# Altium PCB joint_board_boosterpack.PcbDoc
Units mil, origin at the board's own origin, x right, y up, seen from the top; angles counter-clockwise.
Board outline 6000 x 4000 mil, 2 copper layers (Top Layer, Bottom Layer); 43 components, 39 nets, 187 pads, 13 vias.
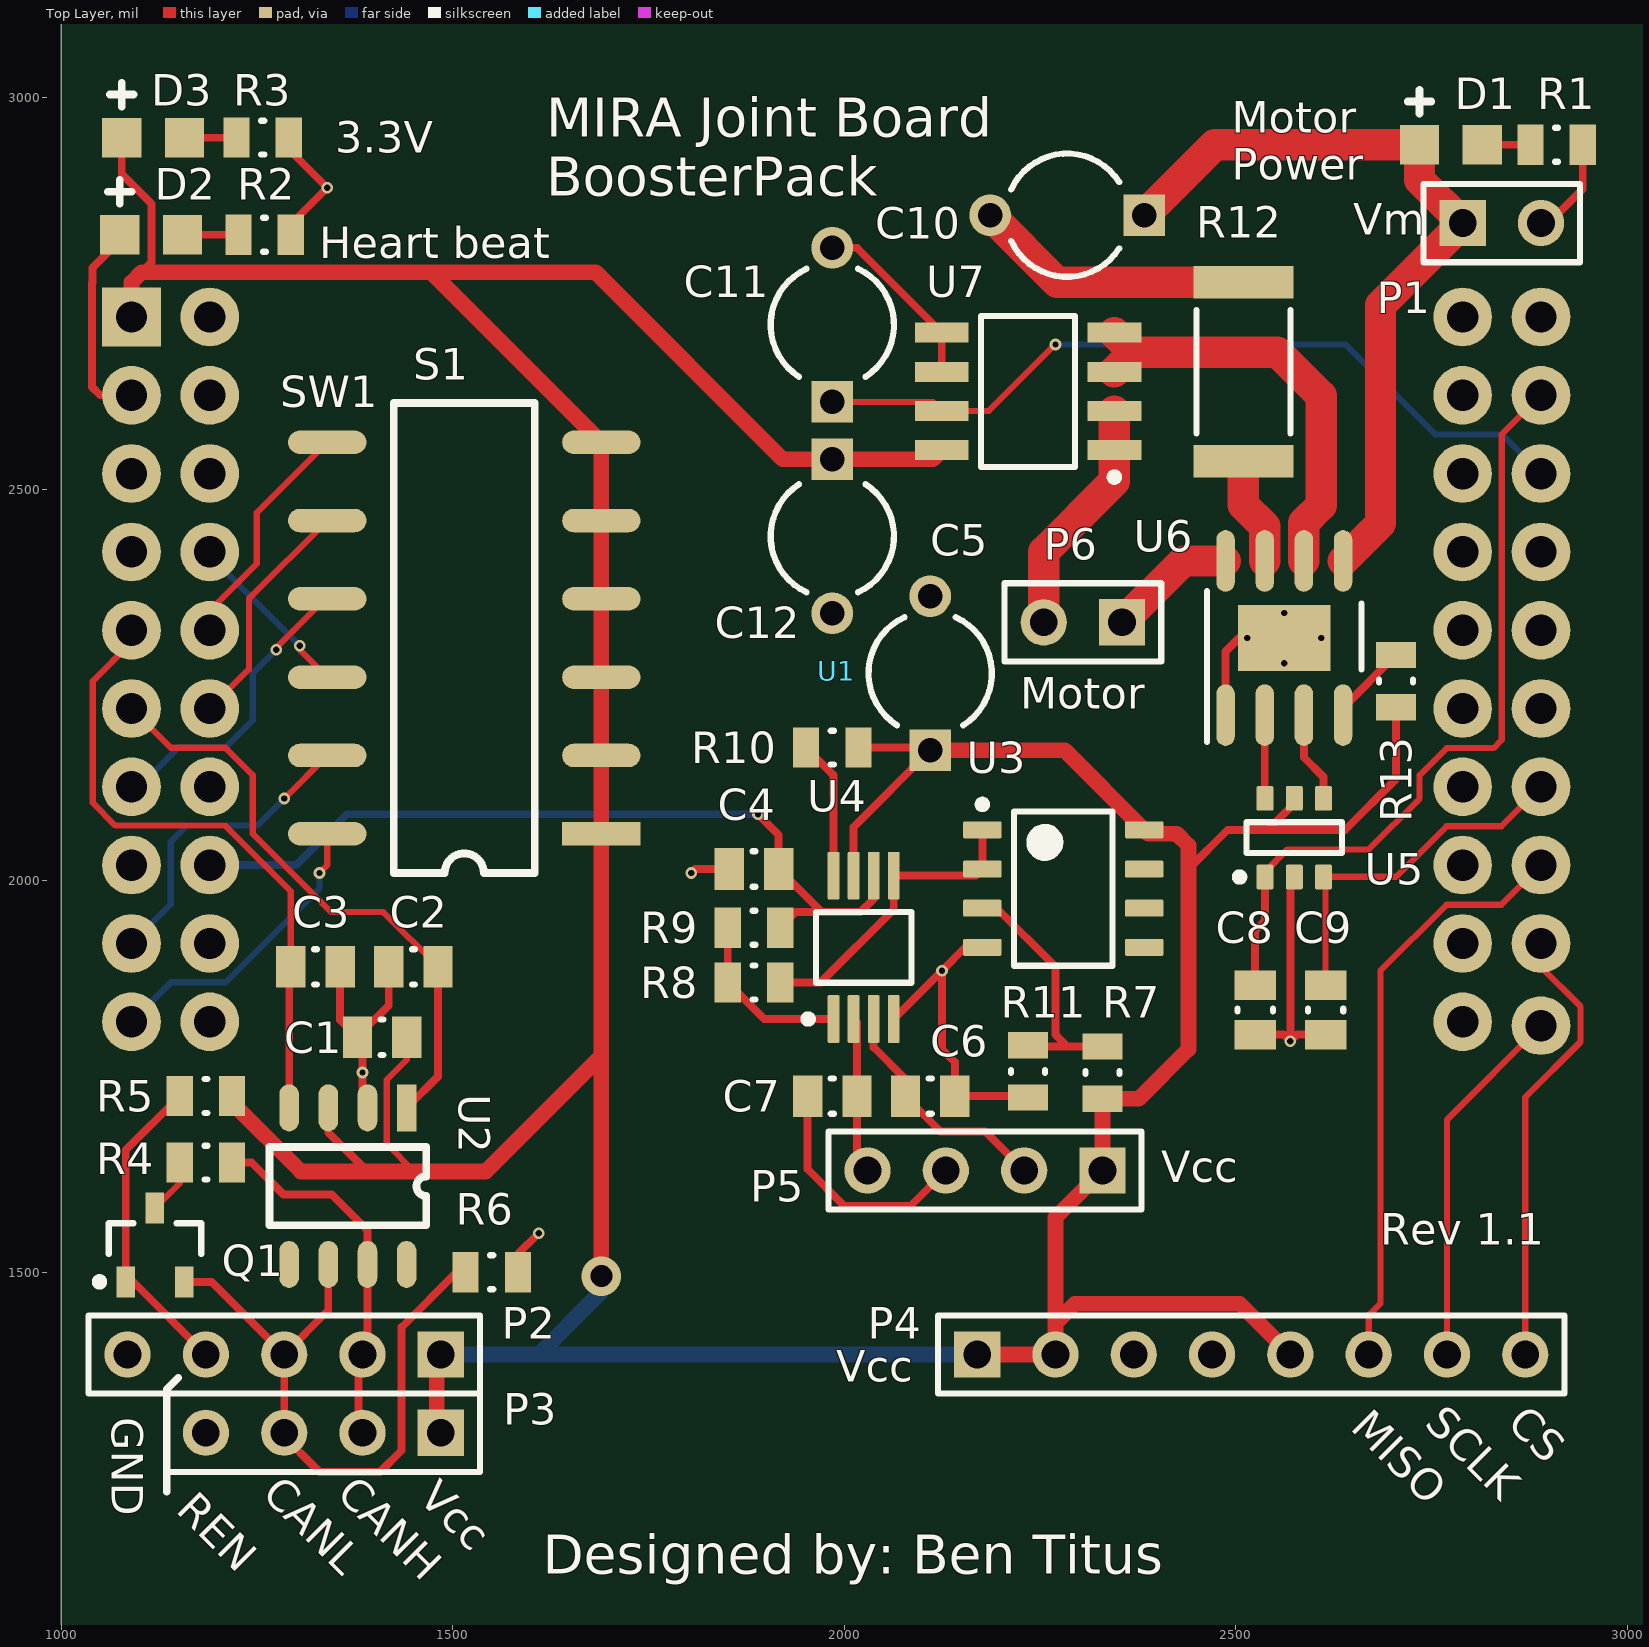
[diagram p0: Top Layer view]
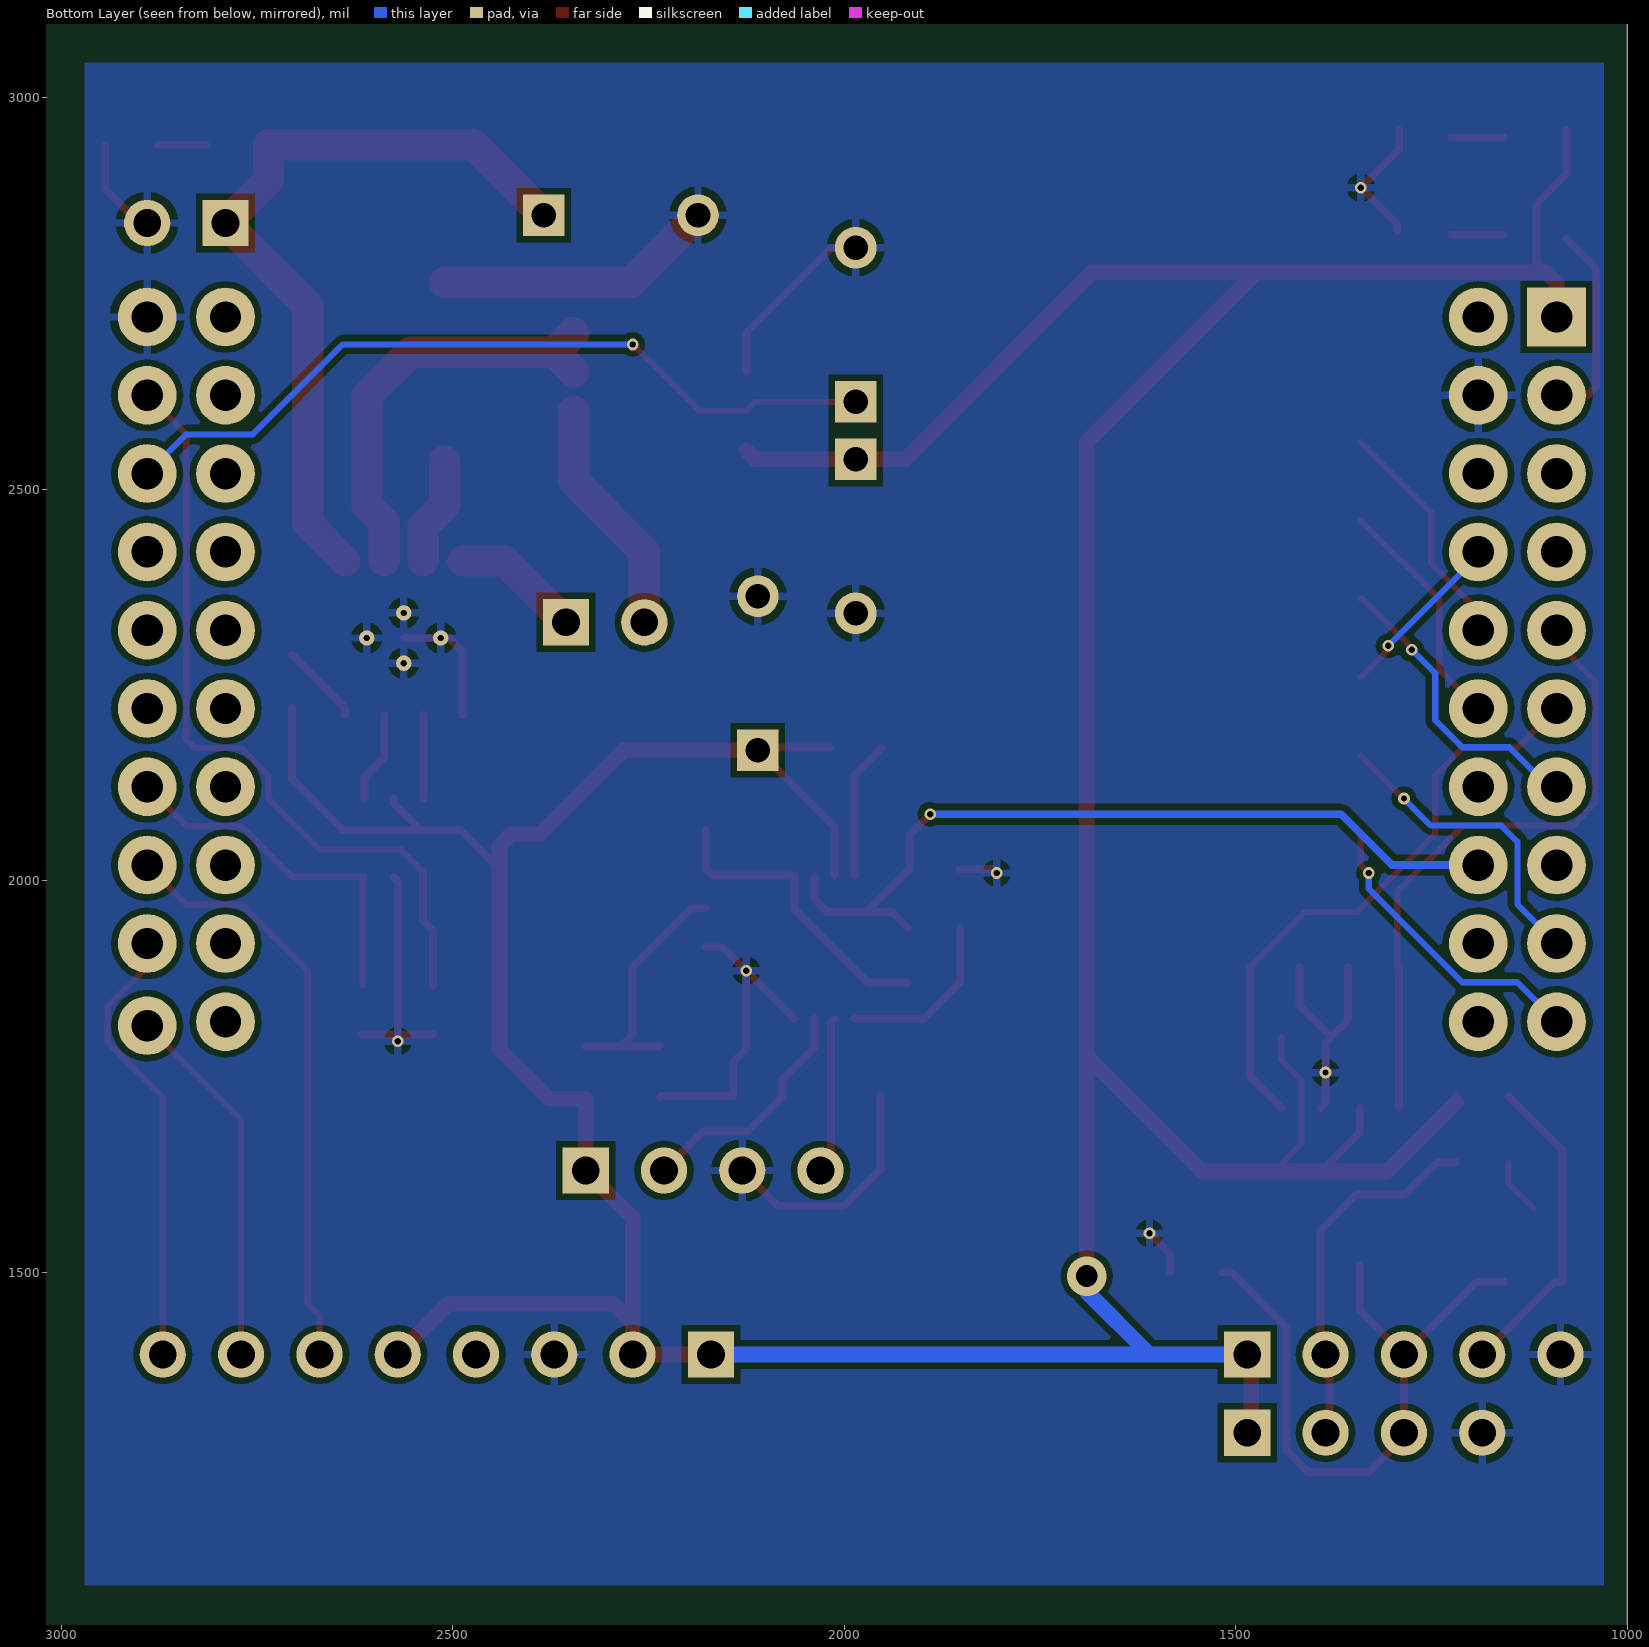
[diagram p1: Bottom Layer view, seen from below]

## Layer stack, top to bottom
Top Solder: solder mask 0.4, Solder Resist, Dk 3.5
Top Layer: signal copper 1.4
Dielectric 1: dielectric 12.6, FR-4, Dk 4.8
Bottom Layer: signal copper 1.4
Bottom Solder: solder mask 0.4, Solder Resist, Dk 3.5

## Board outline
1000,1000 7000,1000 7000,5000 1000,5000

## Design rules (kind name [scope] priority, off if disabled: settings)
Clearance [All] p1: gap=8 ignorepadtopadclearanceinfootprint=FALSE
ComponentClearance [All] p1 off: gap=10 collisioncheckmode=3 verticalgap=10 showdistances=FALSE
PolygonConnect [All] p1: connectstyle=Relief reliefconductorwidth=10 reliefentries=4 polygonreliefangle="90 Angle" airgapwidth=10
RoutingVias [All] p1: holewidth=28 width=50 viastyle="Through Hole" minholewidth=8 minwidth=15 maxholewidth=28 maxwidth=50
SolderMaskExpansion [All] p1: expansion=4
Width [All] p1: maxlimit=100 minlimit=8 preferedwidth=8
29 further rules are at their usual default settings.

## Classes and differential pairs
component class joint_board_boosterpack: D1 D2 D3 P1 P2 P6 R1 R2 R3 U1
component class joint_board_boosterpack_motor_drivers: C8 C9 C10 C11 C12 P6 R12 R13 U5 U6 U7
component class joint_board_boosterpack_load_cell: C4 C5 C6 C7 P6 R7 R8 R9 R10 R11 U3 U4
component class joint_board_boosterpack_hall_effect_encoder: P6
component class joint_board_boosterpack_can: C1 C2 C3 Q1 R4 R5 R6 S1 U2

## Components (designator, comment, footprint, x,y, rotation, side; value= is the part's Value field where it differs from the comment)
C1 "0.1uF" CAPC0805(2012)145_L 1410,1800 r0 top
C2 "47pF" CAPC0805(2012)145_L 1450,1890 r0 top
C3 "47pF" CAPC0805(2012)145_L 1325,1890 r180 top
C4 "10nF" CAPC0805(2012)145_L 1885,2015 r0 top
C5 "1uF" CAPR5-4X5 2110,2265 r90 top
C6 "10nF" CAPC0805(2012)145_L 2110,1725 r180 top
C7 "10nF" CAPC0805(2012)145_L 1985,1725 r0 top
C8 "10nF" CAPC0805(2012)145_L 2525,1835 r90 top
C9 "10nF" CAPC0805(2012)145_L 2615,1835 r90 top
C10 "100uF" CAPR5-4X5 2285,2850 r180 top
C11 "0.1uF" CAPR5-4X5 1985,2710 r90 top
C12 "0.1uF" CAPR5-4X5 1985,2440 r270 top
D1 "VM_LED" "0805 DIODE" 2775,2940 r0 top
D2 "HB_LED_LED" "0805 DIODE" 1115,2825 r0 top
D3 "VCC_LED" "0805 DIODE" 1117.5,2949 r0 top
P1 "Header 2" HDR1X2 2790,2840 r0 top
P2 "Header 5" HDR1X5 1485,1395 r180 top
P3 "Header 4" HDR1X4 1485,1295 r180 top
P4 "Header 8" HDR1X8 2170,1395 r0 top
P5 "Load Cell" HDR1X4 2330,1630 r180 top
P6 "Header 2" HDR1X2 2355,2330 r180 top
Q1 "BS170" SOT23-3 1120,1535 r90 top
R1 "4k" RESC0805(2012)_L 2910,2940 r180 top
R2 "1k" RESC0805(2012)_L 1260,2825 r180 top
R3 "1k" RESC0805(2012)_L 1257.5,2949 r180 top
R4 "115" RESC0805(2012)_L 1185,1640 r0 top
R5 "1k" RESC0805(2012)_L 1185,1725 r0 top
R6 "100k" RESC0805(2012)_L 1550,1500 r180 top
R7 "5.0k" RESC0805(2012)_L 2330,1755 r270 top
R8 "1k" RESC0805(2012)_L 1885,1870 r180 top
R9 "200k" RESC0805(2012)_L 1885,1940 r0 top
R10 "10k" RESC0805(2012)_L 1985,2170 r180 top
R11 "3.9k" RESC0805(2012)_L 2235,1756.54 r90 top
R12 "0.1 Shunt Resistor" RESC2512(6432)_L 2510,2650 r270 top
R13 "10k" RESC0805(2012)_L 2705,2255 r90 top
S1 "DIP_Switch_6" SOP12 1690,2060 r180 top
U1 "BoosterPack Headers" boosterpack_headers 1090,2720 r0 top
U2 "TCAN332" SOP8 1441.37,1710 r270 top
U3 "LM358DR" D0008A_L 2280,1990 r0 top
U4 "INA332AIDGKR" DGK0008A_M 2025,1915 r90 top
U5 "SN74LVC1G18DBVR" DBV0006A_L 2575,2055 r90 top
U6 "DRV8872DDAR" DDA0008H_N 2562.24,2310 r90 top value=Value
U7 "ACS722LLCTR-05AB-T" ALEG-LC-8_V 2235,2625 r90 top

## Footprints (in the part's own frame and the unit in brackets; to place one, negate y for a bottom-side part, rotate by r counter-clockwise, add the part's x,y. Pads: shape width x height; smd on the part's side, far side on the other; paste and mask are expansions set on the pad)
"0805 DIODE" [mil]
  rect 50x50 smd: 1(-40,0) 2(40,0)
  silkscreen extent -55,40 -25,70
ALEG-LC-8_V [mm] "SOIC, 8-Leads, Body 4.9x3.9mm, Pitch 1.27mm"
  rect 0.65x1.75 smd: 1(-1.905,-2.8) 2(-0.635,-2.8) 3(0.635,-2.8) 4(1.905,-2.8) 5(1.905,2.8) 6(0.635,2.8) 7(-0.635,2.8) 8(-1.905,2.8)
  silkscreen extent -2.9,-2.93 2.45,1.53, body extent -2.45,-1.95 2.45,1.95, height 1.75
boosterpack_headers [mil]
  rect 75x75 hole 40: 1(0,0)
  round 75 hole 40: 2(0,-100) 3(0,-200) 4(0,-300) 5(0,-400) 6(0,-500) 7(0,-600) 8(0,-700) 9(0,-800) 10(0,-900) 11(1800,-905) 12(1800,-800) 13(1800,-700) 14(1800,-600) 15(1800,-500) 16(1800,-400) 17(1800,-300) 18(1800,-200) 19(1800,-100) 20(1800,0) 21(100,0) 22(100,-100) 23(100,-200) 24(100,-300) 25(100,-400) 26(100,-500) 27(100,-600) 28(100,-700) 29(100,-800) 30(100,-900) 31(1700,-900) 32(1700,-800) 33(1700,-700) 34(1700,-600) 35(1700,-500) 36(1700,-400) 37(1700,-300) 38(1700,-200) 39(1700,-100) 40(1700,0)
CAPC0805(2012)145_L [mm]
  rect 0.95x1.35 smd: 1(-0.8,0) 2(0.8,0)
  silkscreen extent -0.05,-0.58 0.05,0.58, body extent -1.1,-0.72 1.1,0.72, height 1.45
CAPR5-4X5 [mm] "Capacitor; 2 Leads"
  rect 1.35x1.35 hole 0.8: 1(-2.5,0)
  round 1.35 hole 0.8: 2(2.5,0)
  silkscreen extent -1.69,-2 1.82,2
D0008A_L [mm] "SOIC, 8-Leads, Body 5x4mm, Pitch 1.27mm, IPC High Density"
  rrect18% 1.25x0.55 smd: 1(-2.625,1.905) 2(-2.625,0.635) 3(-2.625,-0.635) 4(-2.625,-1.905) 5(2.625,-1.905) 6(2.625,-0.635) 7(2.625,0.635) 8(2.625,1.905)
  silkscreen extent -2.75,-2.5 1.6,2.85, body extent -3,-2.45 3,2.45, height 1.63
DBV0006A_L [mm] "SOT23, 6-Leads, Body 3.05x1.75mm, Pitch 0.95mm, IPC High Density"
  rrect18% 0.8x0.55 smd: 1(-1.275,0.95) 2(-1.275,0) 3(-1.275,-0.95) 4(1.275,-0.95) 5(1.275,0) 6(1.275,0.95)
  silkscreen extent -1.4,-1.55 0.5,1.9, body extent -1.42,-1.46 1.42,1.46, height 1.11
DDA0008H_N [mm]
  oval 2x0.6 smd paste+0 mask+0.051: 1(-2.5,1.905) 2(-2.5,0.635) 3(-2.5,-0.635) 4(-2.5,-1.905) 5(2.5,-1.905) 6(2.5,-0.635) 7(2.5,0.635) 8(2.5,1.905)
  rect 2.13x3 smd paste+0 mask+0.051: 9(0,0)
  round 0.5 / inner round 1.524 / far side round 0.5 hole 0.203 mask+0.051: V(-0.815,0) V(0,1.2) V(0,-1.2) V(0.815,0)
  silkscreen extent -3.38,-2.5 1.53,2.51, body extent 0,0 0.25,0.25, height 0.25
DGK0008A_M [mm] "TSOP, 8-Leads, Body 3.1x3.1mm, Pitch 0.65mm, IPC Low Density"
  rrect22% 1.55x0.381 smd: 1(-2.325,0.975) 2(-2.325,0.325) 3(-2.325,-0.325) 4(-2.325,-0.975) 5(2.325,-0.975) 6(2.325,-0.325) 7(2.325,0.325) 8(2.325,0.975)
  silkscreen extent -2.45,-1.55 1.15,1.92, body extent -2.45,-1.5 2.45,1.5, height 0.94
HDR1X2 [mm] "Connector; Header; 2 Position"
  rect 1.5x1.5 hole 0.9: 1(0,0)
  round 1.5 hole 0.9: 2(2.54,0)
  silkscreen extent -1.27,-1.27 3.81,1.27
HDR1X4 [mm] "Connector; Header; 4 Position"
  rect 1.5x1.5 hole 0.9: 1(0,0)
  round 1.5 hole 0.9: 2(2.54,0) 3(5.08,0) 4(7.62,0)
  silkscreen extent -1.27,-1.27 8.89,1.27
HDR1X5 [mm] "Connector; Header; 5 Position"
  rect 1.5x1.5 hole 0.9: 1(0,0)
  round 1.5 hole 0.9: 2(2.54,0) 3(5.08,0) 4(7.62,0) 5(10.16,0)
  silkscreen extent -1.27,-1.27 11.43,1.27
HDR1X8 [mm] "Connector; Header; 8 Position"
  rect 1.5x1.5 hole 0.9: 1(0,0)
  round 1.5 hole 0.9: 2(2.54,0) 3(5.08,0) 4(7.62,0) 5(10.16,0) 6(12.7,0) 7(15.24,0) 8(17.78,0)
  silkscreen extent -1.27,-1.27 19.05,1.27
RESC0805(2012)_L [mm]
  rect 0.85x1.3 smd: 1(-0.85,0) 2(0.85,0)
  silkscreen extent -0.05,-0.55 0.05,0.55, body extent -1.1,-0.67 1.1,0.68, height 0.7
RESC2512(6432)_L [mm]
  rect 1.05x3.25 smd: 1(-2.9,0) 2(2.9,0)
  silkscreen extent -2,-1.52 2,1.53, body extent -3.25,-1.7 3.25,1.7, height 0.75
SOP8 [mil]
  rect 60x25 smd: 1(0,0)
  oval 60x25 smd: 2(0,-50) 3(0,-100) 4(0,-150) 5(200,-150) 6(200,-100) 7(200,-50) 8(200,0)
  silkscreen extent 50,-175 150,25
SOP12 [mil]
  rect 100x30 smd: 1(0,0)
  oval 100x30 smd: 2(0,-100) 3(0,-200) 4(0,-300) 5(0,-400) 6(0,-500) 7(350,-500) 8(350,-400) 9(350,-300) 10(350,-200) 11(350,-100) 12(350,0)
  silkscreen extent 85,-550 265,50
SOT23-3 [mm] "SOT23, 3-Leads, Body 2.90x2.45mm, Pitch 0.95mm, IPC Medium Density"
  rect 1x0.6 smd: 1(-1.2,0.95) 2(-1.2,-0.95) 3(1.2,0)
  silkscreen extent -1.32,-1.5 0.7,1.92, body extent -0.7,-1.5 0.7,1.5, height 1.1

## Part data
C1 C2 C3 C4 C6 C7 C8 C9: library part CMP-1590-00003-1, "0805 (2012 Metric) Chip Capacitor", Case-EIA=0805, Case-Metric=2012, PackageReference=CAPC0805(2012)145
C5 C11 C12: library part Cap2, "Capacitor", PackageDescription="Capacitor; 2 Leads", PackageReference=CAPR5-4X5, Published=23-Sep-2002, Publisher="Altium Limited"
C10: library part Cap2, "100uF Filter Capacitor", PackageDescription="Capacitor; 2 Leads", PackageReference=CAPR5-4X5, Published=23-Sep-2002, Publisher="Altium Limited"
D1 D2 D3: library part SMD_LED
P1 P6: "Header, 2-Pin", LatestRevisionDate=17-Jul-2002, LatestRevisionNote="Re-released for DXP Platform.", Publisher="Altium Limited"
P2: "Header, 5-Pin", LatestRevisionDate=17-Jul-2002, LatestRevisionNote="Re-released for DXP Platform.", Publisher="Altium Limited"
P3: "Header, 4-Pin", LatestRevisionDate=17-Jul-2002, LatestRevisionNote="Re-released for DXP Platform.", Publisher="Altium Limited"
P4: "Header, 8-Pin", LatestRevisionDate=17-Jul-2002, LatestRevisionNote="Re-released for DXP Platform.", Publisher="Altium Limited"
P5: library part "Header 4", "Header, 4-Pin", LatestRevisionDate=17-Jul-2002, LatestRevisionNote="Re-released for DXP Platform.", Publisher="Altium Limited"
Q1: "Small Signal MOSFET, 500 mA, 60 V, N-Channel, 3-Pin TO-92, Bulk Box", Manufacturer="On Semiconductor", Package Type=TO-92, Supplier Part Number 1=BS170OS-ND, Channel Polarity="N Channel", ComponentLink1Description="Manufacturer URL", ComponentLink1URL=http://www.onsemi.com/, ComponentLink2Description=Datasheet, ComponentLink2URL=http://www.onsemi.com/pub_link/Collateral/BS170-D.PDF, ComponentLink3Description="Package Specification", ComponentLink3URL=http://www.onsemi.cn/pub_link/Collateral/2N6426-D.PDF, Configuration=Single, DatasheetVersion="Rev. 6", ID Max (A)=0.5, Mounting Technology="Through Hole", PackageDescription="3-Pin Transistor Outline, Body 4.825 x 3.685 mm, Pitch 1.27 mm", PackageReference=TO-92-3-29-11_AM_SL, PackageVersion="Rev. AM", Packing="Bulk Box", PartNumber=BS170, PD Max (W)=0.35, Supplier 1=Digi-Key, V(BR)DSS Min (V)=60, VGS(th) Max (V)=3, VGS Max (V)=20
R1 R2 R3 R4 R5 R6 R7 R8 R9 R10 R11 R13: library part CMP-1591-00002-1, "0805 (2012 Metric) Chip Resistor", Case-EIA=0805, Case-Metric=2012, PackageReference=RESC0805(2012)
R12: library part CMP-1591-00007-1, "2512 (6432 Metric) Chip Resistor", Case-EIA=2512, Case-Metric=6432, PackageReference=RESC2512(6432)
S1: "6 pin DIP switch"
U2: "3.3V CAN Transceiver"
U3: library part CMP-1685-00009-1, "Dual Operational Amplifier, 3 to 32 V, 0 to 70 degC, 8-Pin SOIC (D), Green (RoHS & no Sb/Br), Tape and Reel", Code_JEDEC=MS-012, ComponentLink1Description="Manufacturer URL", ComponentLink1URL=http://www.ti.com/, ComponentLink2Description=Datasheet, ComponentLink2URL=http://www.ti.com/lit/ds/symlink/lm358.pdf, ComponentLink3Description="Package Specification", ComponentLink3URL=http://www.ti.com/lit/ml/msoi002j/msoi002j.pdf, DatasheetVersion="SLOS068T, 04/2015", PackageDescription="8-Pin Small Outline Integrated Circuit, Body 4.9 x 3.9 mm, Pitch 1.27 mm", PackageReference=D0008A, PackageVersion="4040047-3/M, 06/2011"
U4: library part CMP-0944-00077-2, "Low-Power, Single Supply, CMOS, Low Cost, Instrumentation Amplifier, -55 to 125 degC, 8-pin SOP (DGK8), Green (RoHS & no Sb/Br)", Input Bias Current (+/-)(Max)(nA)=0.01, Manufacturer="Texas Instruments", Quiescent Current (+/-)(Typ)(mA)=0.415, CMRR(Min)(dB)=60, Code_JEDEC=MO-187, ComponentLink1Description="Manufacturer URL", ComponentLink1URL=http://www.ti.com/, ComponentLink2Description=Datasheet, ComponentLink2URL=http://www.ti.com/general/docs/lit/getliterature.tsp?genericPartNumber=INA332&fileType=pdf, ComponentLink3Description="Package Specification", ComponentLink3URL=http://www.ti.com/litv/pdf/mpds028d, DatasheetVersion=SBOS216B, Eco-Plan="Green (RoHS & no Sb/Br)", Gain(V/V)="5 to 1000", Input Offset (+/-)(Max)(uV)=8000, Mounting Technology="Surface Mount", Noise at 1kHz(Typ)(nV/rt(Hz))=46, Non-Linearity (+/-)(Max)(%)=0.01, Number of Channels=1, PackageDescription="8-Pin Thin Small Outline, Body 3 x 3 mm, Pitch 0.65 mm", PackageReference=DGK0008A, PackageVersion="4073329/E, 05/2006", PartNumber=INA332AIDGKR, SubFamily="Single Supply", Vs(Max)(V)=5.5, Vs(Min)(V)=2.5
U5: library part CMP-0859-00184-3, "One of Two Noninverting Demultiplexer with 3-State Deselected Output, DBV0006A, LARGE T&R", F @ Nom Voltage(Max)(Mhz)=150, Generic Part Number=SN74LVC1G18, ICC @ Nom Voltage(Max)(mA)=0.01, Manufacturer="Texas Instruments", Operating Temperature Range(C)="-40 to 85", Rating=Catalog, tpd @ Nom Voltage(Max)(ns)=9.3,5,4.2,3.2, Voltage(Nom)(V)=1.8,2.5,3.3,5, 3-State Output=No, Bits(#)=1, DatasheetVersion=SCES406K, Input Type=CMOS/TTL, Logic=True, Output Drive (IOL/IOH)(Max)(mA)=32/-32, Output Type=CMOS, PackageReference=DBV0006A, Schmitt Trigger=No, Specialty Logic Family=Decoder/Encoder/Multiplexer, Sub-Family=Decoder/Encoder/Multiplexer, Technology Family=LVC, VCC(Max)(V)=5.5, VCC(Min)(V)=1.65
U6: "Imported", Alternate_PartNumber=DRV8872DDA, Manufacturer="Texas Instruments", CompType=IC, MountType=SMT, PackageReference=DDA0008H, PartNumber=DRV8872DDAR, PIN_COUNT=9, RefDes=RefDes, TYPE=TYPE
U7: library part CMP-1557-00006-1, "High Accuracy, Galvanically Isolated Current Sensor IC, 3 to 3.6 V, -5 to 5 A IP, -40 to 150 degC, 8-Pin SOIC (LC), RoHS, Tape and Reel", Temperature Max="150 degC", Temperature Min="-40 degC", ComponentLink1Description="Manufacturer URL", ComponentLink1URL=http://www.allegromicro.com/, ComponentLink2Description=Datasheet, ComponentLink2URL=http://www.allegromicro.com/~/media/Files/Datasheets/ACS722-Datasheet.ashx?la=en, ComponentLink3Description="Package Specification", ComponentLink3URL=http://www.allegromicro.com/~/media/Files/Datasheets/ACS711-Datasheet.ashx?la=en, IP Max="5 A", IP Min="-5 A", Mounting Technology="Surface Mount", PackageDescription="8-Pin Small Outline Integrated Package, Body 4.9 x 3.9 mm, Pitch 1.27 mm", Packing="Tape and Reel", PartNumber=ACS722LLCTR-05AB-T, RoHS=TRUE, VCC Max="3.6 V", VCC Min="3 V"

## Via types
v1: diameter 15, hole 8, Top Layer to Bottom Layer, 12 vias
v2: diameter 50, hole 28, Top Layer to Bottom Layer, 1 vias

## Nets (pads, with @x,y where several pads share a name; then routed paths per layer and width w, separated by ;. In a path a pad name is that pad's centre, name@x,y a point inside that pad or via, vN(x,y) a via of type N, cw(c..) or ccw(c..) an arc to the next point about the centre after c; other vN are vias at no path point)
+12: C10.1 D1.1 P1.1 U6.5 | length 1006.5
  Top Layer w40: C10.1 2473.43,2940 D1.1 2735,2895 P1.1 2685,2735 2685,2456.18 U6.5
CANH: P2.2 P3.2 R4.2 U2.7 | length 472
  Top Layer w10: R4.2 1243.46,1640 1284.23,1599.23 1345.77,1599.23 1391.37,1553.63 U2.7 1391.37,1401.37 P2.2 1380,1390 P3.2@1380,1295
CANL: P2.3 P3.3 Q1.2 R6.2 U2.6 | length 861.6
  Top Layer w10: Q1.2 1192.24,1487.76 P2.3 ; U2.6 1341.37,1451.37 P2.3 ; R6.2 1505,1500 1435,1430 1435,1272.53 1407.47,1245 1330,1245 1280,1295 1285,1300 P2.3
CS: P4.8 U1.12 | length 575.1
  Top Layer w8: P4.8 2870,1723.58 2940.5,1794.08 2940.5,1839.5 U1.12@2890,1890
  Top Layer w10: U1.12@2890,1890 U1.12
GND: C1.1 C2.1 C3.1 C4.1 C5.2 C6.1 C7.1 C8.1 C9.1 C10.2 C11.2 C12.2 P1.2 P2.5 P3.4 P4.3 P5.3 R1.1 R2.1 R3.1 R6.1 R11.1 R12.1 U1.20 U1.22 U2.2 U3.4 U4.4 U5.2 U6.1 U6.9 U6.V U7.5 U7.6 | length 2495.4
  Top Layer w10: R3.1@1290.96,2959 R3.1 1290.96,2934.04 v1(1340,2885) 1293.46,2838.46 R2.1@1293.46,2830 ; C3.1 1356.5,1822.01 C1.1 ; U2.2 1385,1716.37 v1(1385,1755) 1385,1793.5 C1.1 ; C2.1 1418.5,1840.67 1378.5,1800.67 C1.1 ; R6.1 1583.46,1523.46 v1(1610,1550) ; v1(1805,2010) 1810,2015 C4.1 ; C7.1 1953.5,1631.5 2000,1585 2085,1585 P5.3 ; C11.2 2016.34,2808.43 U7.5 U7.6 ; U4.4 v1(2125,1885.08) ; U3.4 2154.92,1915 v1(2125,1885.08) ; R11.1 2233.07,1725 C6.1 2141.5,1768.5 2125,1785 v1(2125,1885.08) ; U6.1 2487.24,2292.76 2504.49,2310 U6.9 ; C8.1 2561.5,1803.5 v1(2570,1795) ; U5.2 2570,1999.8 v1(2570,1795) ; C9.1 2578.5,1803.5 v1(2570,1795) ; P1.2 2900,2840 2943.46,2883.46 R1.1
  Top Layer w40: C10.2 2272.4,2764.17 R12.1
IN1: U5.4 U6.3 | length 116.8
  Top Layer w10: U6.3 2587.24,2157.76 2612.4,2132.6 U5.4
IN2: U5.6 U6.2 | length 106.5
  Top Layer w10: U6.2 2537.24,2105.55 U5.6
ISEN: C11.1 U1.18 U7.7 | length 1013.3
  Top Layer w8: C11.1 2113.19,2611.57 U7.7 2185,2600 v1(2270,2685)
  Bottom Layer w8: v1(2270,2685) 2640,2685 2755,2570 2840,2570 U1.18
LOAD_CELL: C4.2 R9.2 U1.28 U4.6 | length 1050.1
  Top Layer w10: v1(1890,2085) 1916.5,2058.5 C4.2 1971.5,1960 ; R9.2 1938.46,1960 1971.5,1960 ; U4.6 2037.8,1976.7 2021.1,1960 1971.5,1960
  Bottom Layer w10: U1.28 1300,2020 1365,2085 v1(1890,2085)
MISO: P4.6 U1.13 | length 757.1
  Top Layer w8: P4.6 2670,1445 2685,1460 2685,1885 2769.5,1969.5 2839.5,1969.5 U1.13
MOTOR_DIR: C8.2 U1.19 U5.1 | length 1000.5
  Top Layer w8: U5.1@2537.6,2011.22 2566.38,2040 2670,2040 2735,2105 2735,2135 2769.5,2169.5 2829.5,2169.5 2840,2180 2840,2570 U1.19
  Top Layer w10: C8.2 2525,1936.5 2537.6,1949.09 U5.1 U5.1@2537.6,2011.22
MOTOR_PWM: C9.2 U1.14 U5.3 | length 464.7
  Top Layer w8: C9.2 2615,2002.2 U5.3 2612.6,2005 2705,2005 2769.5,2069.5 2839.5,2069.5 U1.14
NetC6_2: C6.2 P5.2 U4.3 | length 306.6
  Top Layer w10: U4.3 2037.8,1787.2 2078.5,1746.5 C6.2 2078.5,1724.33 2122.84,1680 2180,1680 P5.2
NetC7_2: C7.2 P5.4 U4.2 | length 200.8
  Top Layer w10: U4.2 2016.5,1819.17 C7.2 2016.5,1643.5 P5.4
NetD1_2: D1.2 R1.2 | length 61.5
  Top Layer w10: D1.2 R1.2
NetD2_1: D2.1 U1.2 | length 260.1
  Top Layer w10: D2.1@1077.5,2820 1040,2782.5 1040,2763.88 1039.5,2763.38 1039.5,2630.5 1050,2620 U1.2
NetD2_2: D2.2 R2.2 | length 66.5
  Top Layer w10: D2.2@1157.5,2825 R2.2@1224.04,2825
NetD3_2: D3.2 R3.2 | length 66.5
  Top Layer w10: D3.2 R3.2
NetP6_1: P6.1 U6.8 | length 164.7
  Top Layer w40: P6.1 2433.43,2408.43 U6.8
NetP6_2: P6.2 U7.1 U7.2 | length 307.4
  Top Layer w40: P6.2 2255,2420 2345.24,2510.24 U7.1 U7.2
NetQ1_1: Q1.3 R4.1 | length 70.8
  Top Layer w8: Q1.3 1151.54,1613.78 R4.1
NetR7_1: R7.1 R11.2 U3.3 | length 327.8
  Top Layer w10: U3.3 2195,1965 2270,1890 2270,1803.46 2285,1788.46 ; R11.2 2236.54,1788.46 2285,1788.46 ; R7.1 2285,1788.46
NetR8_1: R8.1 U3.1 U3.2 U4.5 | length 393.5
  Top Layer w10: R8.1 1970,1870 2063.39,1963.39 U4.5 2168.19,2006.54 U3.2 U3.1
NetR8_2: R8.2 R9.1 U4.1 | length 224.4
  Top Layer w10: R9.1 R8.2 1898.07,1823.46 U4.1
NetR10_2: R10.2 U4.8 | length 178
  Top Layer w10: R10.2 1986.61,2134.92 U4.8
NetR12_2: R12.2 U6.7 | length 138.7
  Top Layer w40: R12.2 2510,2480 2537.24,2452.76 U6.7
NetR13_2: R13.2 U6.4 | length 105
  Top Layer w10: U6.4 2637.24,2220.71 R13.2
OUT1: U6.6 U7.3 U7.4 | length 552.7
  Top Layer w40: U7.3 2370.24,2675 ; U7.4 2370.24,2675 ; U6.6 2587.24,2457.24 2609.24,2479.24 2609.24,2619.24 2553.49,2675 2370.24,2675
RES_EN: P2.4 Q1.1 R5.1 | length 406.6
  Top Layer w10: R5.1 1082.6,1656.06 Q1.1 1092.24,1487.76 P2.4
RXD: C3.2 U1.5 U2.4 | length 818.2
  Top Layer w8: U1.5 1090,2304.5 1040.5,2255 1040.5,2099.5 1069.5,2070.5 1209.5,2070.5 1293.5,1986.5 C3.2
  Top Layer w10: U2.4 1291.37,1887.87 C3.2
SCLK: P4.7 U1.11 | length 469.7
  Top Layer w8: P4.7 2770,1695 U1.11
SW1: S1.12 U1.10 | length 384.6
  Top Layer w8: v1(1330,2010) 1340,2020 S1.12
  Bottom Layer w8: U1.10 1140.5,1870.5 1210.5,1870.5 1330,1990 v1(1330,2010)
SW2: S1.11 U1.9 | length 396.3
  Top Layer w8: v1(1285,2105) S1.11
  Bottom Layer w8: U1.9 1140,1970 1140,2050 1160.5,2070.5 1250.5,2070.5 v1(1285,2105)
SW3: S1.10 U1.24 | length 222.1
  Top Layer w8: v1(1305,2300) 1305,2295 S1.10
  Bottom Layer w8: U1.24 1190,2415 v1(1305,2300)
SW4: S1.9 U1.7 | length 386.1
  Top Layer w8: v1(1275,2295) 1275,2297.58 1337.42,2360 S1.9
  Bottom Layer w8: U1.7 1100,2120 1150.5,2170.5 1210.5,2170.5 1245,2205 1245,2265 v1(1275,2295)
SW5: S1.8 U1.26 | length 302.1
  Top Layer w8: U1.26 1240,2270 1240,2360 S1.8
SW6: S1.7 U1.25 | length 302.1
  Top Layer w8: U1.25 1190,2345 1250,2405 1250,2470 S1.7
TXD: C2.2 U1.6 U2.1 | length 768.7
  Top Layer w8: U1.6 1140,2170 1210,2170 1245,2135 1245,2060 1345,1960 1411.5,1960 C2.2
  Top Layer w10: U2.1 1481.5,1750.12 C2.2
VCC: C1.2 C5.1 C12.1 D3.1 P2.1 P3.1 P4.1 P4.2 P4.5 P5.1 R5.2 R7.2 R10.1 R13.1 S1.1 S1.2 S1.3 S1.4 S1.5 S1.6 U1.1 U2.3 U3.8 U4.7 U5.5 U7.8 | length 6876.4
  Top Layer w8: C1.2 1441.5,1771.5 1415.87,1745.87 1415.87,1664.13 1451.37,1628.63
  Top Layer w10: D3.1@1077.5,2959 D3.1 1077.5,2902.5 1115.5,2864.5 1115.5,2789.62 1102.94,2777.06 ; R5.2@1218.46,1716.54 R5.2 ; U2.3 1341.37,1678.63 1391.37,1628.63 ; U4.7 2012.2,2068.78 C5.1 2106.57,2170 R10.1 ; 2440,2015 2490,2065 2541.22,2065 ; U5.5 2575,2098.78 2541.22,2065 ; R13.1 2705,2130 2640,2065 2541.22,2065
  Top Layer w20: U1.1 1090,2764.12 1102.94,2777.06 1472.94,2777.06 ; R5.2@1218.46,1716.54 1306.37,1628.63 1391.37,1628.63 1451.37,1628.63 1542.37,1628.63 1690,1776.25 ; P3.1@1480,1295 1480,1390 P2.1 ; v2(1690,1495) 1690,1776.25 ; C5.1 2281.77,2166.57 U3.8 2388.35,2060 2425,2060 2440,2045 2440,2015 2440,1785 2376.54,1721.54 R7.2 P5.1 2270,1570 2270,1435 ; U7.8 2113.19,2538.43 C12.1 1921.57,2538.43 1682.94,2777.06 1472.94,2777.06 ; P4.1 P4.2 2270,1435 ; P4.5 2505,1460 2295,1460 2270,1435 ; 1472.94,2777.06 S1.6 S1.5 S1.4 S1.3 S1.2 S1.1 1690,1776.25
  Bottom Layer w20: P2.1 1610,1395 ; v2(1690,1495) 1690,1475 1610,1395 ; P4.1 1610,1395
pads on no net: P4.4 U1.3 U1.4 U1.8 U1.15 U1.16 U1.17 U1.21 U1.23 U1.27 U1.29 U1.30 U1.31 U1.32 U1.33 U1.34 U1.35 U1.36 U1.37 U1.38 U1.39 U1.40 U2.5 U2.8 U3.5 U3.6 U3.7

## Polygon pours and split planes (outlines as drawn)
GND on Bottom Layer "GND_L02_P000" (solid, pour order 0): 1030,1100 2970,1100 2970,3045 1030,3045

## Silkscreen, mask and mechanical layers (free items; w line width, h text height)
Top Overlay:
  lines w10: 1135,1220 1135,1350.49 1149.76,1365.24
  text "3.3V" at 1350,2930 h40
  text "Motor / Power" at 2495,2895 h40
  text "MIRA Joint Board / BoosterPack" at 1620,2875 h50
  text "Vm" at 2650,2825 h40
  text "Heart beat" at 1330,2795 h40
  text "SW1" at 1280,2605 h40
  text "Motor" at 2225,2220 h40
  text "Vcc" at 2405,1615 h40
  text "Rev 1.1" at 2685,1535 h40
  text "Vcc" at 1990,1360 h40
  text "GND" at 1065,1315 h40 r270
  text "SCLK" at 2740,1305 h40 r315
  text "CS" at 2845,1305 h40 r315
  text "MISO" at 2645,1300 h40 r315
  text "CANL" at 1255,1215 h40 r315
  text "CANH" at 1350,1215 h40 r315
  text "Vcc" at 1455,1210 h40 r315
  text "REN" at 1145,1195 h40 r315
  text "Designed by: Ben Titus" at 1615,1115 h50
Drill Drawing:
  lines w10: 1030,1095 1030,3045 2975,3045 2975,1095 1030,1095